# Altium PCB ESP_Grow_Rev_A.PcbDoc
Units mm, origin at the board's own origin, x right, y up, seen from the top; angles counter-clockwise.
Board outline 80 x 80 mm, 4 copper layers (Top Layer, GND, Power, Bottom Layer), stack 1.546 mm thick; 21 components, 9 nets, 82 pads, 0 vias.
Unrouted connection lines stored in the file: 21.
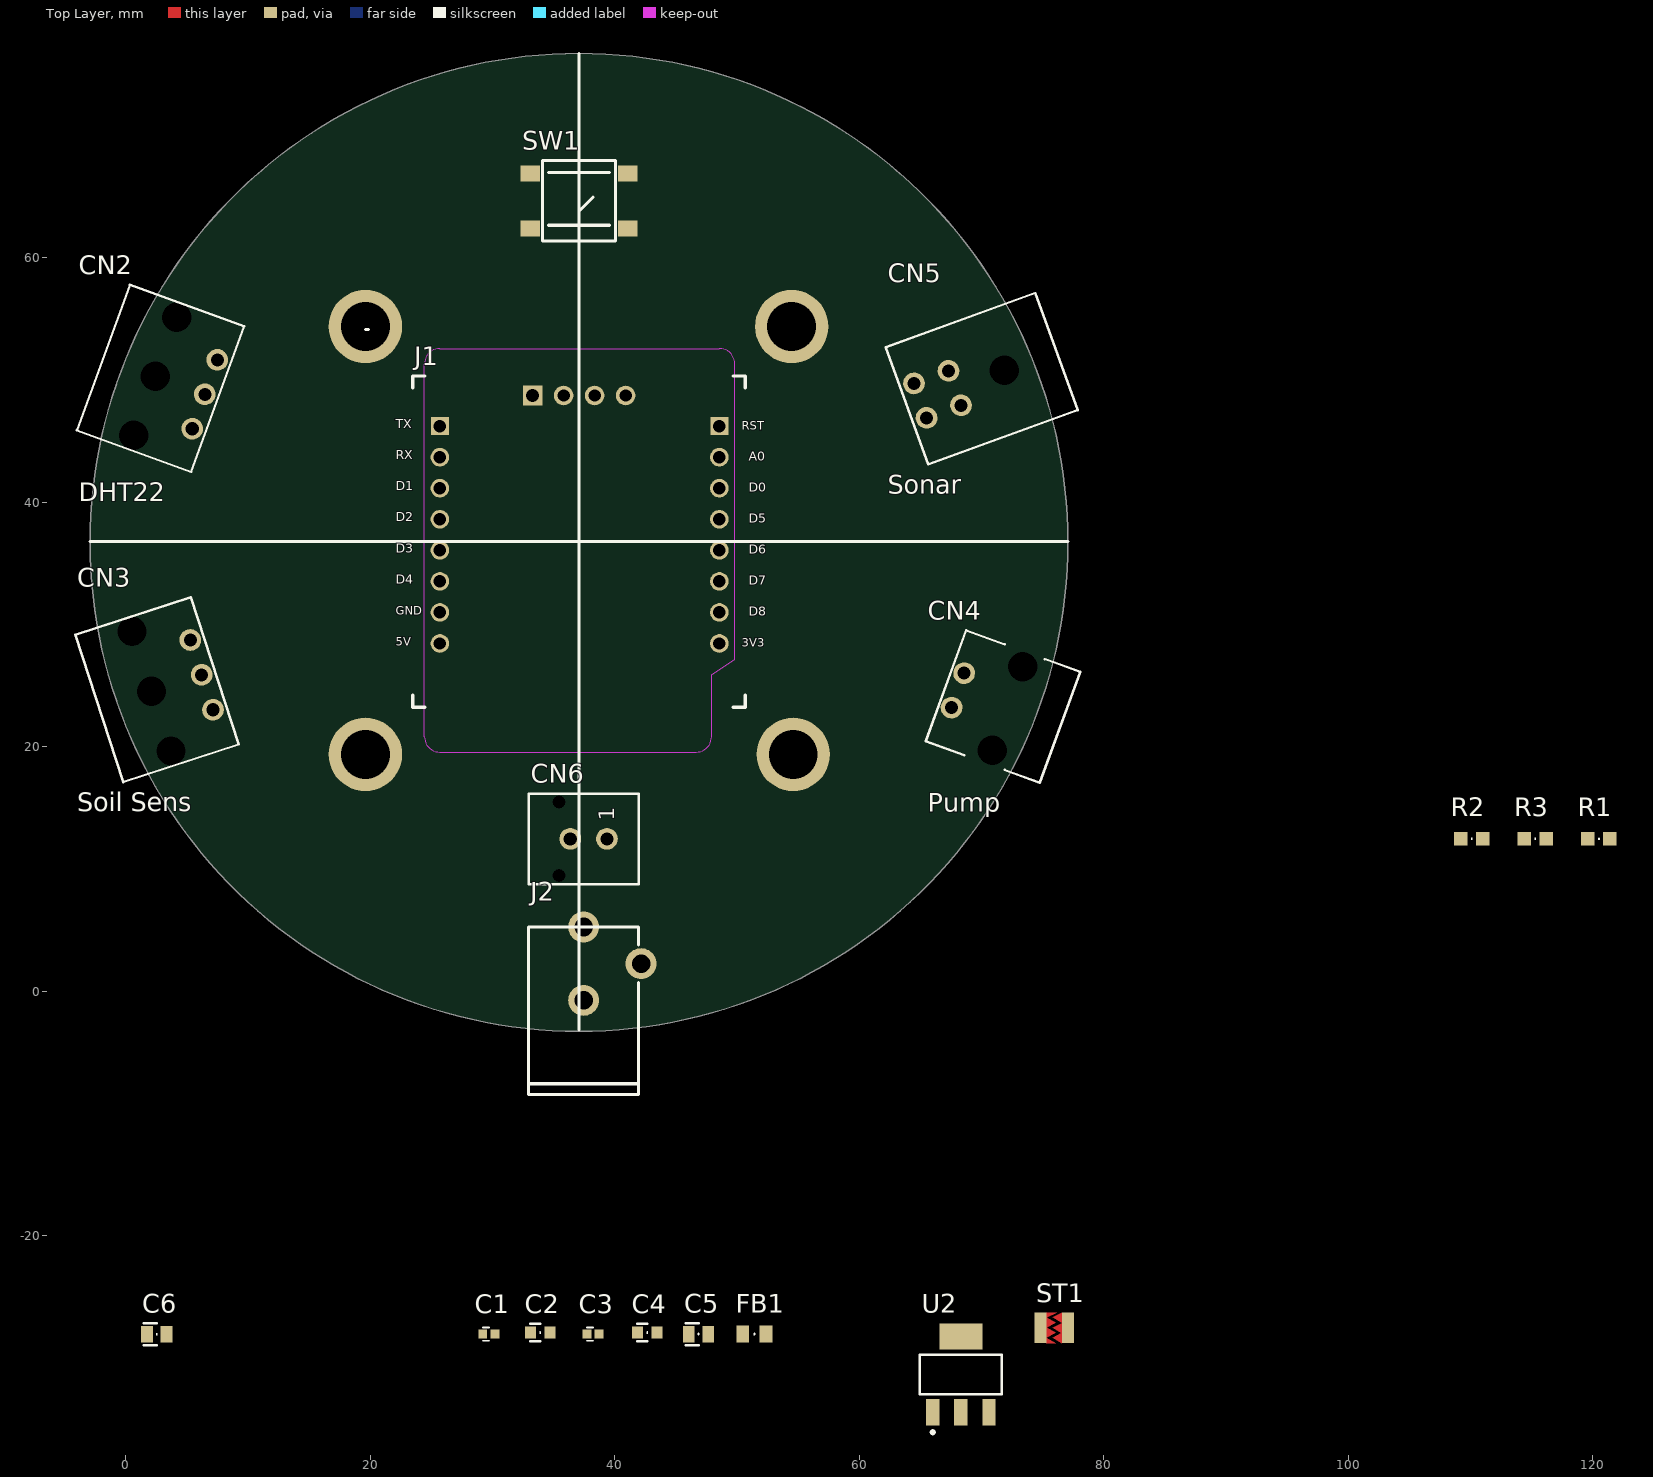
[diagram p0: Top Layer view]
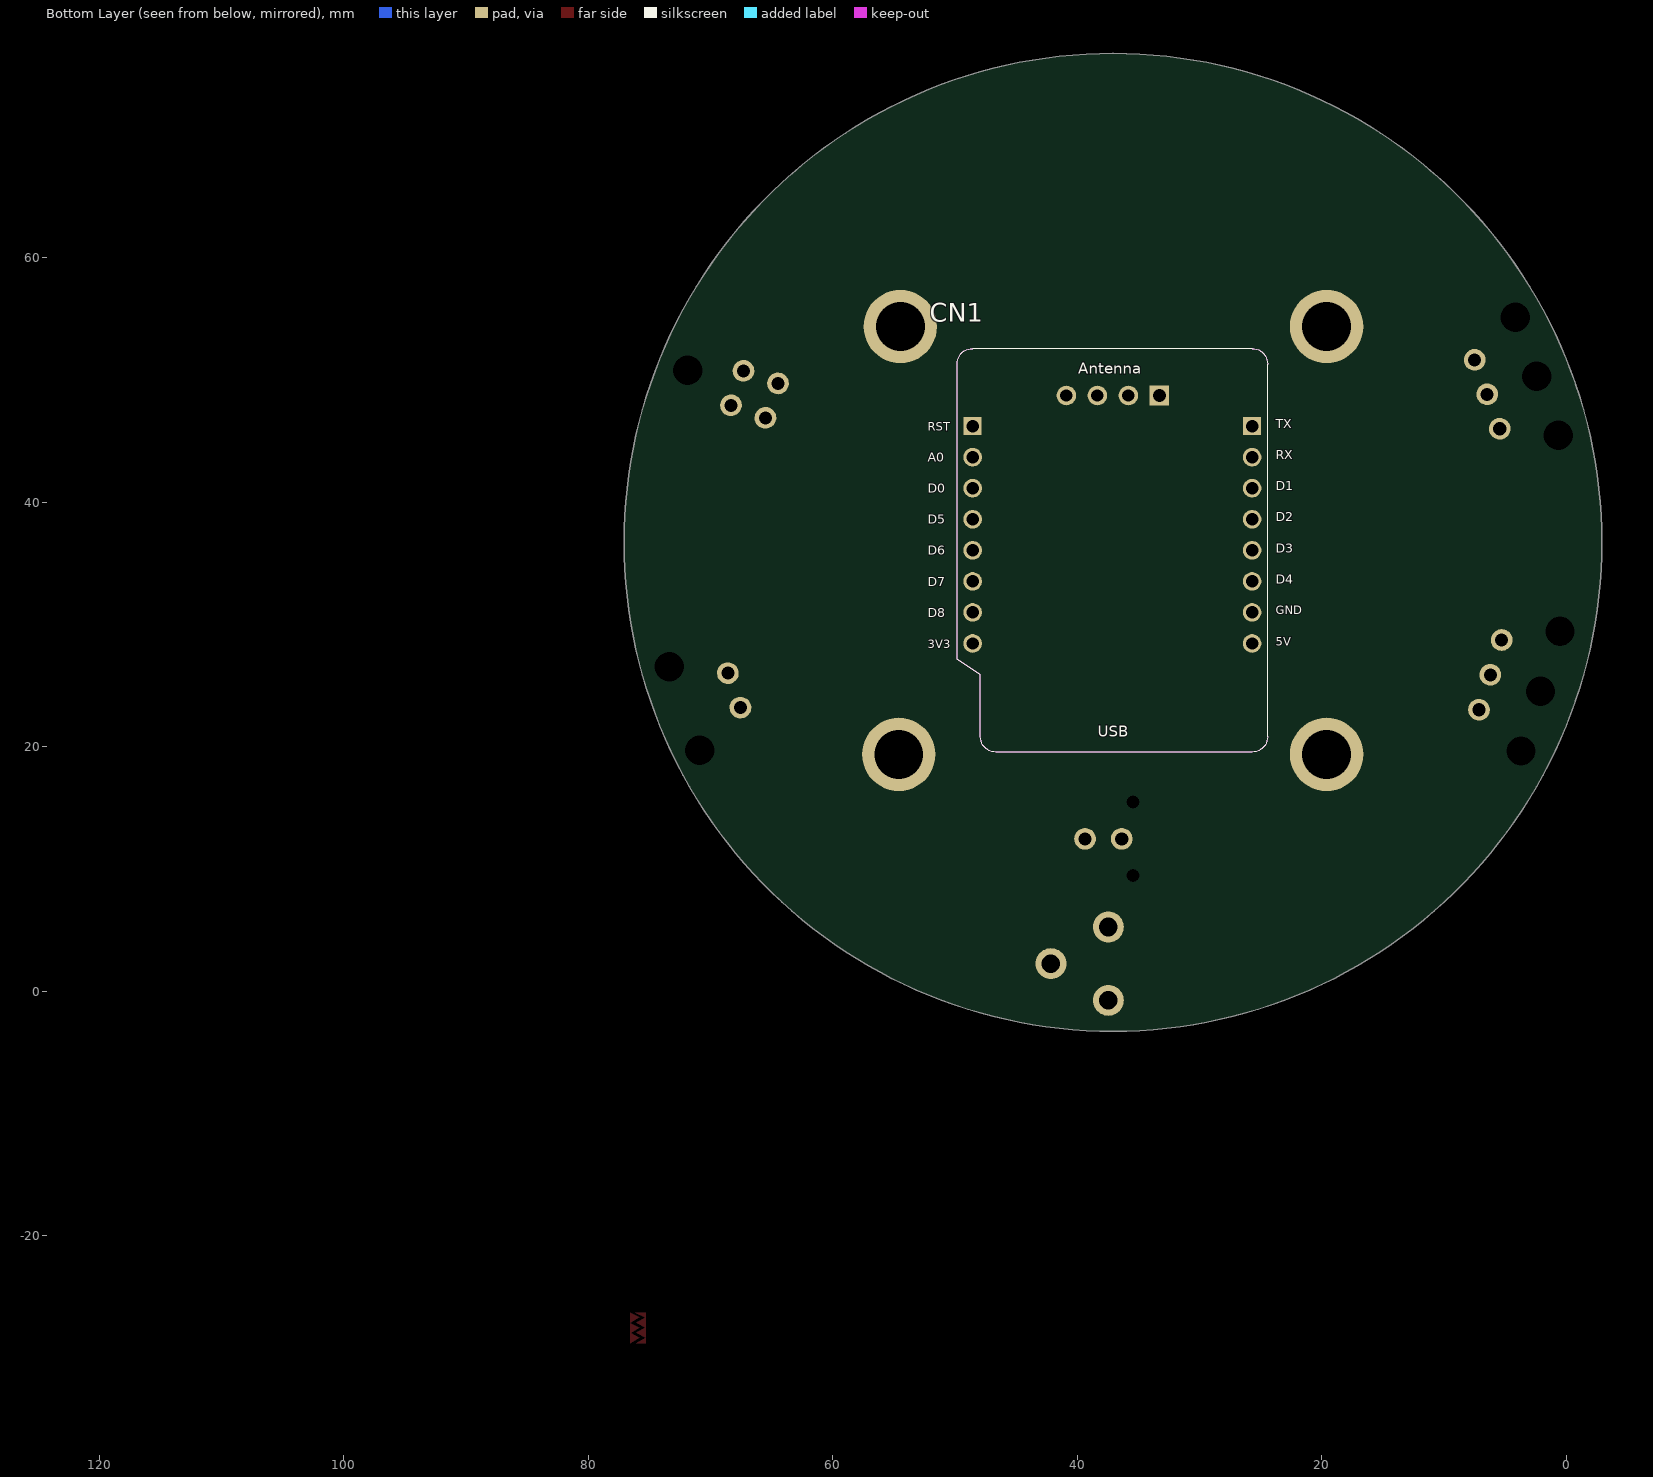
[diagram p1: Bottom Layer view, seen from below]

## Layer stack, top to bottom
Top Solder: solder mask 0.0152, Solder Resist, Dk 2.7
Top Layer: signal copper 0.0457
Dielectric 2: prepreg 0.2017, PP-006, Dk 3.82
GND: signal copper 0.0305
Dielectric 1: core 0.9906, FR-4, Dk 4.71
Power: signal copper 0.0305
Dielectric 3: prepreg 0.2017, PP-006, Dk 3.82
Bottom Layer: signal copper 0.0457
Bottom Solder: solder mask 0.0152, Solder Resist, Dk 2.7

## Board outline
-2.916,36.703 ccw(c37.084,36.703) 37.084,-3.297 ccw(c37.084,36.703) 77.084,36.703 ccw(c37.084,36.703) 37.084,76.703 ccw(c37.084,36.703)

## Design rules (kind name [scope] priority, off if disabled: settings)
Clearance [All] p1: gap=0.254 ignorepadtopadclearanceinfootprint=FALSE except(0: Arc-Hole Track-Hole SMDPad-Hole THPad-Hole Via-Hole Fill-Hole Poly-Hole Region-Hole Text-Hole)
PolygonConnect [All] p1: connectstyle=Relief reliefconductorwidth=0.254 reliefentries=4 polygonreliefangle="90 Angle" airgapwidth=0.254
RoutingVias [All] p1: holewidth=0.711 width=1.27 viastyle="Through Hole" minholewidth=0.711 minwidth=1.27 maxholewidth=0.711 maxwidth=1.27
SolderMaskExpansion [All] p1: expansion=0.102
Width [All] p1: maxlimit=0.254 minlimit=0.254 preferedwidth=0.254
30 further rules are at their usual default settings.

## Components (designator, comment, footprint, x,y, rotation, side; value= is the part's Value field where it differs from the comment)
C1 "0.1uF" CAPC0402(1005)_M 29.718,-28.067 r0 top
C2 "1uF" CAPC0603(1608)_N 33.909,-27.94 r0 top
C3 "0.1uF" CAPC0402(1005)_M 38.227,-28.067 r0 top
C4 "1uF" CAPC0603(1608)_N 42.672,-27.94 r0 top
C5 "10uF" CAPC0805(2012)_L 46.863,-28.067 r0 top
C6 "10uF" CAPC0805(2012)_L 2.54,-28.067 r0 top
CN1 "J/Wemo_ESP_Shield" Wemos_d1 49.93,19.606 r180 bottom
CN2 "DHT22" "Molex 1x3 Microfit 90deg" 6.472,48.814 r340 top
CN3 "Soil Sens" "Molex 1x3 Microfit 90deg" 6.218,25.862 r18 top
CN4 "Pump" "Molex 1x2 Microfit 90deg" 72.136,23.114 r160 top
CN5 "Sonar" "Molex 2x2 Microfit 90deg" 70.63,54.239 r200 top
CN6 "Aux Pwr" "Molex 1x2 Microfit 3.0" 39.37,12.446 r90 top
FB1 "FERRITE 600 OHM 2.0A 0805" RESC0805(2012)_N 51.435,-28.067 r0 top
J1 "OLED 0.96\"" OLED_0.96_I2C 33.284,48.717 r0 top
J2 "CONN PWR JACK 2.1" CONN_PWR_JACK_2.1x5.5mm 37.465,5.238 r180 top
R1 "10K" RESC0603(1608)_M 120.523,12.446 r0 top
R2 "10K" RESC0603(1608)_M 110.109,12.446 r0 top
R3 "10K" RESC0603(1608)_M 115.316,12.446 r0 top
ST1 "Shark Tooth" SharkTooth 74.319,-28.909 r0 top
SW1 "PTS645SM43SMTR92 LFS" "SW TACT Red 6mm x 6mm" 37.084,64.643 r180 top
U2 "LD1117S33" DSO-G3 68.326,-31.369 r0 top

## Footprints (in the part's own frame and the unit in brackets; to place one, negate y for a bottom-side part, rotate by r counter-clockwise, add the part's x,y. Pads: shape width x height; smd on the part's side, far side on the other; paste and mask are expansions set on the pad)
CAPC0402(1005)_M [mm] "Chip Capacitor, Body 1.0x0.5mm, Height 0.7mm, IPC Low Density"
  rect 0.72x0.72 smd: 1(-0.5,0) 2(0.5,0)
  silkscreen extent -0.5,-0.55 0,0.55, body extent -0.55,-0.3 0.55,0.3, height 0.7
CAPC0603(1608)_N [mm] "Chip Capacitor, Body 1.6x0.8mm, Height 1.0mm, IPC Medium Density"
  rect 0.9x1 smd: 1(-0.8,0) 2(0.8,0)
  silkscreen extent -0.82,-0.73 0.05,0.73, body extent -0.8,-0.44 0.8,0.43, height 0.86
CAPC0805(2012)_L [mm] "Chip Capacitor, Body 2.0x1.2mm, Height 1.55mm, IPC High Density"
  rect 0.95x1.35 smd: 1(-0.8,0) 2(0.8,0)
  silkscreen extent -1.05,-0.9 0.05,0.9, body extent -1.1,-0.72 1.1,0.72, height 1.55
CONN_PWR_JACK_2.1x5.5mm [mm] "Power Connector, 2.1mm ID, 5.5mm OD"
  round 2.54 hole 1.524: 1(0,0) 2(0,6) 3(-4.7,3)
  silkscreen extent -4.5,0 4.5,13.7, body extent -4.9,-0.61 4.5,13.79, height 11
DSO-G3 [mm] "SOT-223/SC-73; 4 Leads; Body 6.7 x 7.3 mm, inc. leads (LxW max)"
  rect 1.1x2.15 smd: 1(-2.3,-3.1) 2(0,-3.1) 3(2.3,-3.1)
  rect 3.5x2.15 smd: 4(0,3.1)
  silkscreen extent -3.35,-4.85 3.35,1.63, body extent -3.25,-3.4 3.25,3.56, height 1.68
"Molex 1x2 Microfit 3.0" [mil] "Connector; Header; 1x2 Position"
  round 0 hole 42 unplated: 0(-118.11,155.11) 0(118.11,155.11)
  round 70 hole 42: 1(0,0) 2(0,118.11)
  silkscreen extent -146,-102 146,252, body extent -141,-98 141,248, height 390
"Molex 1x2 Microfit 90deg" [mm] "Connector; Header; 1x2 Position"
  round 0 hole 2.41 unplated: 0(0,-3.65) 0(0,3.65)
  round 1.778 hole 1.067: 1(4.32,-1.5) 2(4.32,1.5)
  silkscreen extent -4.56,-4.85 5.37,4.81, body extent -4.55,-4.76 5.35,4.89, height 5.64
"Molex 1x3 Microfit 90deg" [mil] "Molex Microfit 1x3 90deg"
  round 0 hole 94.5 unplated: 0(-170.08,202.76) 0(-170.08,-202.76) 0(-170.08,0)
  round 70 hole 42: 1(0,-118.11) 2(0,0) 3(0,118.11)
  silkscreen extent -347,-250 44,249, body extent -349,-251 41,247, height 222
"Molex 2x2 Microfit 90deg" [mil] "Microfit 90 deg 2x2 Position"
  round 0 hole 94.88 unplated: 0(0,144.09)
  round 70 hole 42: 1(170.08,85.04) 2(170.08,203.15) 3(288.19,85.04) 4(288.19,203.15)
  silkscreen extent -178,-55 334,346, body extent -179,-56 303,344, height 348
OLED_0.96_I2C [mm]
  rect 1.6x1.6 hole 1.03: 1(0,0)
  round 1.6 hole 1.02: 2(2.54,0) 3(5.08,0) 4(7.62,0)
  silkscreen extent -9.8,-25.5 17.4,1.6, body extent -9.85,-25.6 17.45,1.7, height 9
RESC0603(1608)_M [mm] "Chip Resistor, Body 1.6x0.8mm, IPC Low Density"
  rect 1.1x1.1 smd: 1(-0.9,0) 2(0.9,0)
  silkscreen extent -0.05,-0.05 0.05,0.05, body extent -0.8,-0.43 0.8,0.43, height 0.51
RESC0805(2012)_N [mm] "Chip Resistor, Body 2.0x1.3mm, IPC Medium Density"
  rect 1.05x1.4 smd: 1(-0.95,0) 2(0.95,0)
  silkscreen extent -0.05,-0.05 0.05,0.05, body extent -1.01,-0.63 0.99,0.63, height 0.46
SharkTooth [mm] "Sharks Tooth"
  rect 1x2.5 smd: 1(0.51,1.35) 2(2.77,1.35)
  Top Layer region: 1.846,2.6 1,2.6 1,2.159
  Top Layer region: 1.75,1.75 1,2.2 1,1.359
  Top Layer region: 1.75,0.95 1,1.391 1,0.559
  Top Layer region: 1.75,0.1 1,0.541 1,0.1
  Top Layer region: 1.525,0.55 2.275,0.1 2.275,0.941
  Top Layer region: 1.525,1.35 2.275,0.909 2.275,1.741
  Top Layer region: 1.525,2.21 2.275,1.769 2.275,2.601
  body extent -0.1,0 3.4,2.7, height 0.1
"SW TACT Red 6mm x 6mm" [mm] "Switch, tactile, red button, SMD 6 mm x 6 mm"
  rect 1.6x1.3 smd: 1(-4,2.25) 2(4,2.25) 3(-4,-2.25) 4(4,-2.25)
  silkscreen extent -3,-3.3 3,3.3, body extent -4.5,-3.1 4.5,3.1, height 4.3
Wemos_d1 [mil] "Wemos D1 footprint"
  rect 58.09x58.09 / inner rect 60x60 / far side rect 58.09x58.09 hole 40: 1(53.62,1047.4) 16(953.62,1047.4)
  round 60 hole 40: 2(53.62,947.4) 3(53.62,847.4) 4(53.62,747.4) 5(53.62,647.4) 6(53.62,547.4) 7(53.62,447.4) 8(53.62,347.4) 9(953.62,347.4) 10(953.62,447.4) 11(953.62,547.4) 12(953.62,647.4) 13(953.62,747.4) 14(953.62,847.4) 15(953.62,947.4)
  Keep-Out Layer lines w1: 1003.62,47.4 cw(c953.62,47.4) 953.62,-2.6 128.62,-2.6 cw(c128.62,47.4) 78.62,47.4 78.62,247.4 3.62,297.4 3.62,1247.4 cw(c53.62,1247.4) 53.62,1297.4 953.62,1297.4 cw(c953.62,1247.4) 1003.62,1247.4 1003.62,47.4
  silkscreen extent 4,-3 1004,1297, body extent 0,0 1008,1354, height 189

## Part data
C1 C3: library part CMP-001-0612-11, "CAP CER 0.1UF 50V X7R 0402", Capacitance=100nF, Dielectric Material=Ceramic, Package (Imperial)=0402, Package (Metric)=1005, Temperature (Max)=125°C, Temperature (Min)=-55°C, Temperature Coefficient=X7R, Tolerance=20%, Voltage (Rated)=0V, Height=500µm, Length=1mm, Mounting Type=SMD
C2 C4: library part CMP-007-0108-08, "CAP CER 1UF 25V 10% X7R 0603", Capacitance=1µF, Dielectric Material=Ceramic, Package (Imperial)=0603, Package (Metric)=1608, Temperature (Max)=125°C, Temperature (Min)=-55°C, Temperature Coefficient=X7R, Tolerance=10%, Voltage (Rated)=25V, Height=900µm, Length=1.6mm, Mounting Type=SMD, Width=800µm
C5 C6: library part CMP-007-0088-08, "CAP CER 10UF 25V X6S 0805", Capacitance=10µF, Dielectric Material=Ceramic, Package (Imperial)=0805, Package (Metric)=2012, Temperature (Max)=105°C, Temperature (Min)=-55°C, Temperature Coefficient=X6S, Tolerance=20%, Voltage (Rated)=25V, Height=1.4mm, Length=2mm, Mounting Type=SMD, Width=1.25mm
CN1: "Wemo Mini Shield for ESP-12", Name="Wemo Mini Shield"
CN2 CN3: library part CMP-001-0428-01, "Molex Microfit 1x3 90deg Header", Color=Black, Manufacturer="Molex Inc", Manufacturer Part Number=0436500304, Supplier Part Number 1=WM1876-ND, Category="Connectors, Interconnects", ComponentLink1Description=http://www.molex.com/pdm_docs/sd/436500304_sd.pdf, ComponentLink1URL=http://www.molex.com/pdm_docs/sd/436500304_sd.pdf, Component Name="MICROFIT 3.0 HDR 90deg 3CKT", Connector Type="Header, Shrouded", Contact Finish=Gold, Contact Finish Thickness="15µin (0.38µm)", Contact Mating Length=-, Contact Type="Male Pin", Fastening Type="Locking Ramp", Features="Board Lock", Mounting Type="Through Hole, Right Angle", Number of Positions=3, Number of Positions Loaded=All, Number of Rows=1, Packaging=Tray, Pin Count=3, Pitch="0.118\" (3.00mm)", Pricing 1="1=1.39, 10=1.224, 50=1.104, 100=1.056, 250=0.96, 500=0.864, 1000=0.768, 2500=0.696, 5000=0.672 (USD)", RoHS="RoHS Compliant", Row Spacing=-, Stock 1=42564, Supplier 1=Digi-Key, Termination=Solder
CN4: library part CMP-001-0425-01, "Molex Microfit 1x2 90deg Header", Current Rating="5 A", Manufacturer=Molex, Manufacturer Part Number=43650-0204, Supplier Part Number 1=538-43650-0204, Voltage Rating="600 V", Brand=Molex, Category="Headers & Wire Housings", ComponentLink1Description=http://www.mouser.com/ds/2/276/0436500204_PCB_HEADERS-168465.pdf, ComponentLink1URL=http://www.mouser.com/ds/2/276/0436500204_PCB_HEADERS-168465.pdf, Component Name="MICROFIT 3.0 HDR 90deg 2CKT", Contact Material=Brass, Contact Plating=Gold, Housing Material=Thermoplastic, Minimum Order Quantity=1, Mounting Angle=Right, Mounting Style=-, Number of Positions=2, Number of Rows=1, Packaging=Tray, Pin Count=2, Pitch="3 mm", Pricing 1="1=1.55, 10=1.23, 100=1.01, 500=0.961, 1000=0.855, 2000=0.710 (AUD)", Product Category="Micro-Fit 3.0 Connectors", Product Type=Headers, Reeling=False, RoHS="RoHS Compliant", RoHS - Mouser=Y, Series=43650, Standard Pack Qty=3927, Stock 1=3217, Supplier 1=Mouser, Termination Style="Through Hole", Tradename="Micro-Fit 3.0", Type=Shrouded
CN5: library part CMP-001-0429-01, "Molex Microfit 2x2 90deg Header", Color=Black, Manufacturer="Molex Inc", Manufacturer Part Number=0430450400, Supplier Part Number 1=WM1814-ND, Category="Connectors, Interconnects", ComponentLink1Description=http://www.molex.com/pdm_docs/sd/430450400_sd.pdf, ComponentLink1URL=http://www.molex.com/pdm_docs/sd/430450400_sd.pdf, Component Name="MICROFIT 3.0 HDR 90deg 4CKT", Connector Type="Header, Shrouded", Contact Finish=Tin, Contact Finish Thickness="100µin (2.54µm)", Contact Mating Length=-, Contact Type="Male Pin", Fastening Type="Locking Ramp", Features="Board Lock", Mounting Type="Through Hole, Right Angle", Number of Positions=4, Number of Positions Loaded=All, Number of Rows=2, Packaging=Tray, Pin Count=4, Pitch="0.118\" (3.00mm)", Pricing 1="1=1.35, 10=1.228, 50=1.1026, 100=1.0525, 250=0.95228, 500=0.8771, 1000=0.7518, 2500=0.70168, 5000=0.6666 (USD)", RoHS="RoHS Compliant", Row Spacing="0.118\" (3.00mm)", Stock 1=9668, Supplier 1=Digi-Key, Termination=Solder
CN6: library part CMP-001-0437-01, "Molex Microfit 1x2 Vert Header", Color=Black, Manufacturer="Molex, LLC", Manufacturer Part Number=0430450227, ComponentLink1Description=http://www.molex.com/pdm_docs/sd/430450227_sd.pdf, ComponentLink1URL=http://www.molex.com/pdm_docs/sd/430450227_sd.pdf, Component Name="MICROFIT 3.0 HDR VERT CPI 2CKT", Connector Type=Header, Contact Finish=Tin, Contact Finish Thickness="60µin (1.52µm)", Contact Mating Length=-, Contact Type="Male Pin", Fastening Type="Locking Ramp", Features="Board Guide", Mounting Type="Through Hole", Number of Positions=2, Number of Positions Loaded=All, Number of Rows=2, Packaging=Tray, Part Status=Active, Pin Count=2, Pitch=-, Pricing 1="1=0.8, 10=0.705, 50=0.636, 100=0.6083, 250=0.553, 500=0.4977, 1000=0.4424, 2500=0.40092, 5000=0.3871 (USD)", RoHS="RoHS Compliant", Shrouding="Shrouded - 4 Wall", Stock 1=4002, Termination=Solder
FB1: library part CMP-007-0197-01, "600 OHM 0805 2.0A", Current Rating=2A, DC Resistance (DCR)="150 mOhm Max", Impedance @ Frequency="600 Ohm @ 100MHz", Manufacturer="Wurth Electronics Inc", Manufacturer Part Number=742792040, Package / Case="0805 (2012 Metric)", ComponentLink1Description=http://katalog.we-online.de/pbs/datasheet/742792040.pdf, ComponentLink1URL=http://katalog.we-online.de/pbs/datasheet/742792040.pdf, Component Name="FERRITE 600 OHM 2.0A 0805", Creator=osman, Filter Type="Differential Mode - Single", Mounting Type="Surface Mount", Packaging="Cut Tape (CT)", Pin Count=2, Pricing 1="1=0.24, 50=0.2344, 100=0.2156, 500=0.20624, 1000=0.19687, 2000=0.1875 (USD)", RoHS="RoHS Compliant", Stock 1=34670
J1: library part OLED_0.96_I2C, "SSD1306 I2C OLED 0.96\""
J2: library part CMP-001-0193-01, "2.1 mm barrel jack", Color=Black, Current Rating=2.5A, Manufacturer="CUI Inc", Manufacturer Part Number=PJ-002A, Operating Temperature="-25°C ~ 85°C", Voltage - Rated=16VDC, ComponentLink1Description="Manufacturer Link", ComponentLink1URL=http://domino.kycon.com/internet/Products.html, ComponentLink2Description=http://www.cui.com/product/resource/digikeypdf/pj-002a.pdf, ComponentLink2URL=http://www.cui.com/product/resource/digikeypdf/pj-002a.pdf, ComponentLink3Description=http://www.cui.com/product/resource/digikeypdf/pj-002ah.pdf, ComponentLink3URL=http://www.cui.com/product/resource/digikeypdf/pj-002ah.pdf, Component Name="CONN PWR JACK 2.1", Connector Type=Jack, Contact Material="Copper Alloy", Contact Material - Plating=Tin, DatasheetDocument=09-May-2002, Features=-, Gender=Male, Housing Color=Black, Housing Material=Thermoplastic, Internal Switch(s)="Single Switch, Normally Closed", Mounting Type="Through Hole, Right Angle", Number of Positions/Contacts="2 Conductors, 3 Contacts", Pin Count=3, Plug/Mating Plug Diameter="2.1mm ID, 5.5mm OD", Pricing 1="1=1.01, 10=0.704, 100=0.4724, 500=0.3819, 1000=0.3417, 2500=0.27135 (USD)", Published=17-Dec-2003, Publisher="Altium Limited", RoHS="RoHS Compliant", Shielding=Unshielded, Stock 1=47553, Termination="Solder Eyelet(s)"
R1 R2 R3: library part CMP-007-0359-12, "RES 10K OHM 1/10W 1% 0603 SMD", Package (Imperial)=0603, Package (Metric)=1608, Power=100mW, Resistance=10k, Temperature Coefficient=±100ppm/°C, Tolerance=1%, Height=550µm, Termination=SMD/SMT
ST1: "Sharks Tooth Small"
SW1: library part CMP-011-0021-01, "SWITCH TACTILE SPST-NO 0.05A 12V", Contact Rating @ Voltage="0.05A @ 12VDC", Illumination Type, Color=-, Manufacturer=C&K, Operating Force=160gf, Operating Temperature="-20°C ~ 60°C", Actuator Height off PCB, Vertical=4.30mm, Actuator Length, Right Angle=-, Actuator Material="Polyamide (PA66), Nylon 6/6", Actuator Orientation="Top Actuated", Actuator Type=Standard, Circuit=SPST-NO, ComponentLink1Description=http://www.ckswitches.com/media/1471/pts645.pdf, ComponentLink1URL=http://www.ckswitches.com/media/1471/pts645.pdf, Component Name="PTS645SM43SMTR92 LFS", Features="Blue Actuator", Illumination=Non-Illuminated, Illumination Voltage (Nominal)=-, Ingress Protection=-, Manufacturer Part Number="PTS645SM43SMTR92 LFS", Mechanical Life="100,000 Cycles", Mounting Type="Surface Mount", Outline="6.00mm x 6.00mm", Packaging="Cut Tape (CT)", Part Status=Active, Pin Count=4, Pricing 1="1=0.15, 10=0.147, 25=0.1416, 50=0.1366, 100=0.129, 250=0.12144, 500=0.11638 (USD)", RoHS="RoHS Compliant", Stock 1=234699, Switch Function=Off-Mom, Switch Travel=-, Termination Style="Gull Wing"
U2: library part CMP-008-0010-01, "3.3 volt fixed regulator, 800mA", Component Name=LD1117S33, Pin Count=4

## Free pads (board coordinates)
  round 6 hole 4: 0(19.61,19.356) 0(19.61,54.356) 0(54.483,54.356) 0(54.61,19.356)

## Nets (pads, with @x,y where several pads share a name; then routed paths per layer and width w, separated by ;. In a path a pad name is that pad's centre, name@x,y a point inside that pad or via, vN(x,y) a via of type N, cw(c..) or ccw(c..) an arc to the next point about the centre after c; other vN are vias at no path point)
3.3V: CN1.8 J1.1 R1.1 R2.1 R3.1 ST1.2
12V: CN6.1
BTN: R1.2 SW1.2
DHT22: CN2.2
GND: C3.2 C4.2 C5.2 CN1.10 CN6.2 J1.2 SW1.4 U2.1
NetC3_1: C3.1 C4.1 C5.1 ST1.1 U2.2 U2.4
OLED_SCL: J1.3 R3.2
OLED_SDA: J1.4 R2.2
SOIL_SEN: CN1.2 CN3.2
pads on no net: C1.1 C1.2 C2.1 C2.2 C6.1 C6.2 CN1.1 CN1.3 CN1.4 CN1.5 CN1.6 CN1.7 CN1.9 CN1.11 CN1.12 CN1.13 CN1.14 CN1.15 CN1.16 CN2.0 CN2.1 CN2.3 CN3.0 CN3.1 CN3.3 CN4.0 CN4.1 CN4.2 CN5.0 CN5.1 CN5.2 CN5.3 CN5.4 CN6.0 FB1.1 FB1.2 J2.1 J2.2 J2.3 SW1.1 SW1.3 U2.3

## Silkscreen, mask and mechanical layers (free items; w line width, h text height)
Top Overlay:
  lines w0.254: -2.921,36.767 77.089,36.767 ; 19.61,54.102 19.864,54.102 ; 37.084,-3.175 37.084,76.708
Mechanical 1:
  circle w0.254: c37.084,36.767 r40

## Text inside footprints (layer, text, board x,y; h text height)
CN1: Top Overlay "D7" at 50.958,33.229 h0.76; Top Overlay "D6" at 50.958,35.769 h0.76; Top Overlay "A0" at 50.958,43.389 h0.76; Top Overlay "RST" at 50.395,45.929 h0.69; Top Overlay "D8" at 50.958,30.689 h0.76; Top Overlay "3V3" at 50.395,28.149 h0.69; Top Overlay "D0" at 50.958,40.849 h0.76; Top Overlay "D5" at 50.958,38.309 h0.76; Top Overlay "5V" at 22.113,28.249 h0.69; Top Overlay "D1" at 22.113,40.949 h0.76; Top Overlay "D4" at 22.113,33.329 h0.76; Top Overlay "D3" at 22.113,35.869 h0.76; Top Overlay "RX" at 22.113,43.489 h0.76; Top Overlay "TX" at 22.113,46.029 h0.76; Top Overlay "GND" at 22.113,30.789 h0.69; Top Overlay "D2" at 22.113,38.409 h0.76; Bottom Overlay "Antenna" at 39.93,50.506 h0.9; Bottom Overlay "USB" at 38.33,20.806 h0.9; Bottom Overlay "GND" at 23.756,30.806 h0.69; Bottom Overlay "D4" at 23.756,33.329 h0.76; Bottom Overlay "D3" at 23.756,35.869 h0.76; Bottom Overlay "RX" at 23.756,43.489 h0.76; Bottom Overlay "TX" at 23.756,46.029 h0.76; Bottom Overlay "5V" at 23.756,28.249 h0.69; Bottom Overlay "D1" at 23.756,40.949 h0.76; Bottom Overlay "D2" at 23.756,38.409 h0.76; Bottom Overlay "D7" at 52.244,33.129 h0.76; Bottom Overlay "D6" at 52.244,35.669 h0.76; Bottom Overlay "A0" at 52.244,43.289 h0.76; Bottom Overlay "RST" at 52.244,45.829 h0.69; Bottom Overlay "D8" at 52.244,30.589 h0.76; Bottom Overlay "3V3" at 52.244,28.049 h0.69; Bottom Overlay "D0" at 52.244,40.749 h0.76; Bottom Overlay "D5" at 52.244,38.209 h0.76
CN6: Top Overlay "1" at 39.97,13.946 h1.27 r90